# Altium PCB Cordobejro.PcbDoc
Units mm, origin at the board's own origin, x right, y up, seen from the top; angles counter-clockwise.
Board outline 36 x 35 mm, 3 copper layers (Top Layer, GroundPanel, Bottom Layer), stack 0.427 mm thick; 40 components, 31 nets, 167 pads, 52 vias.
Unrouted connection lines stored in the file: 2.
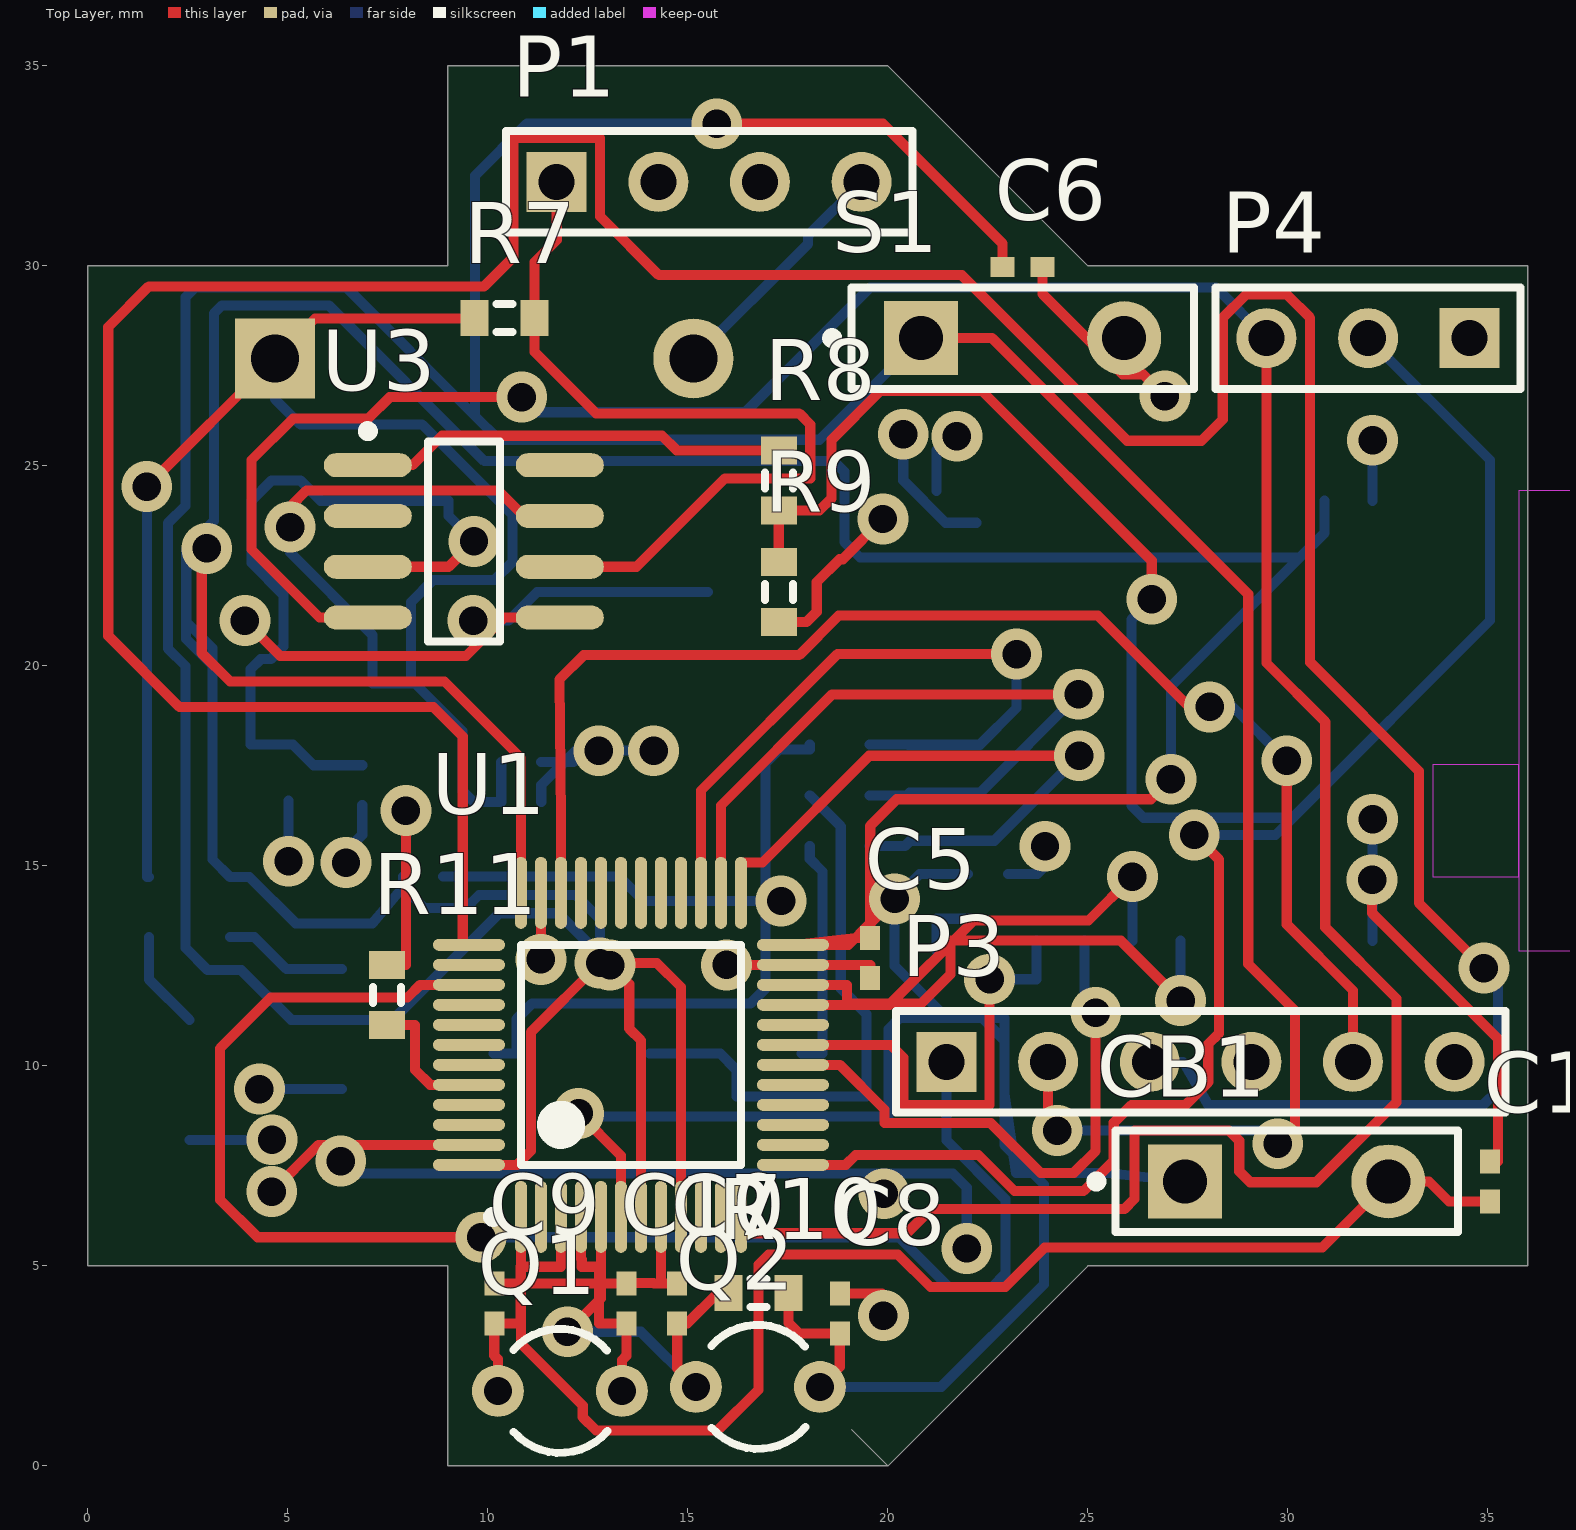
[diagram p0: Top Layer view]
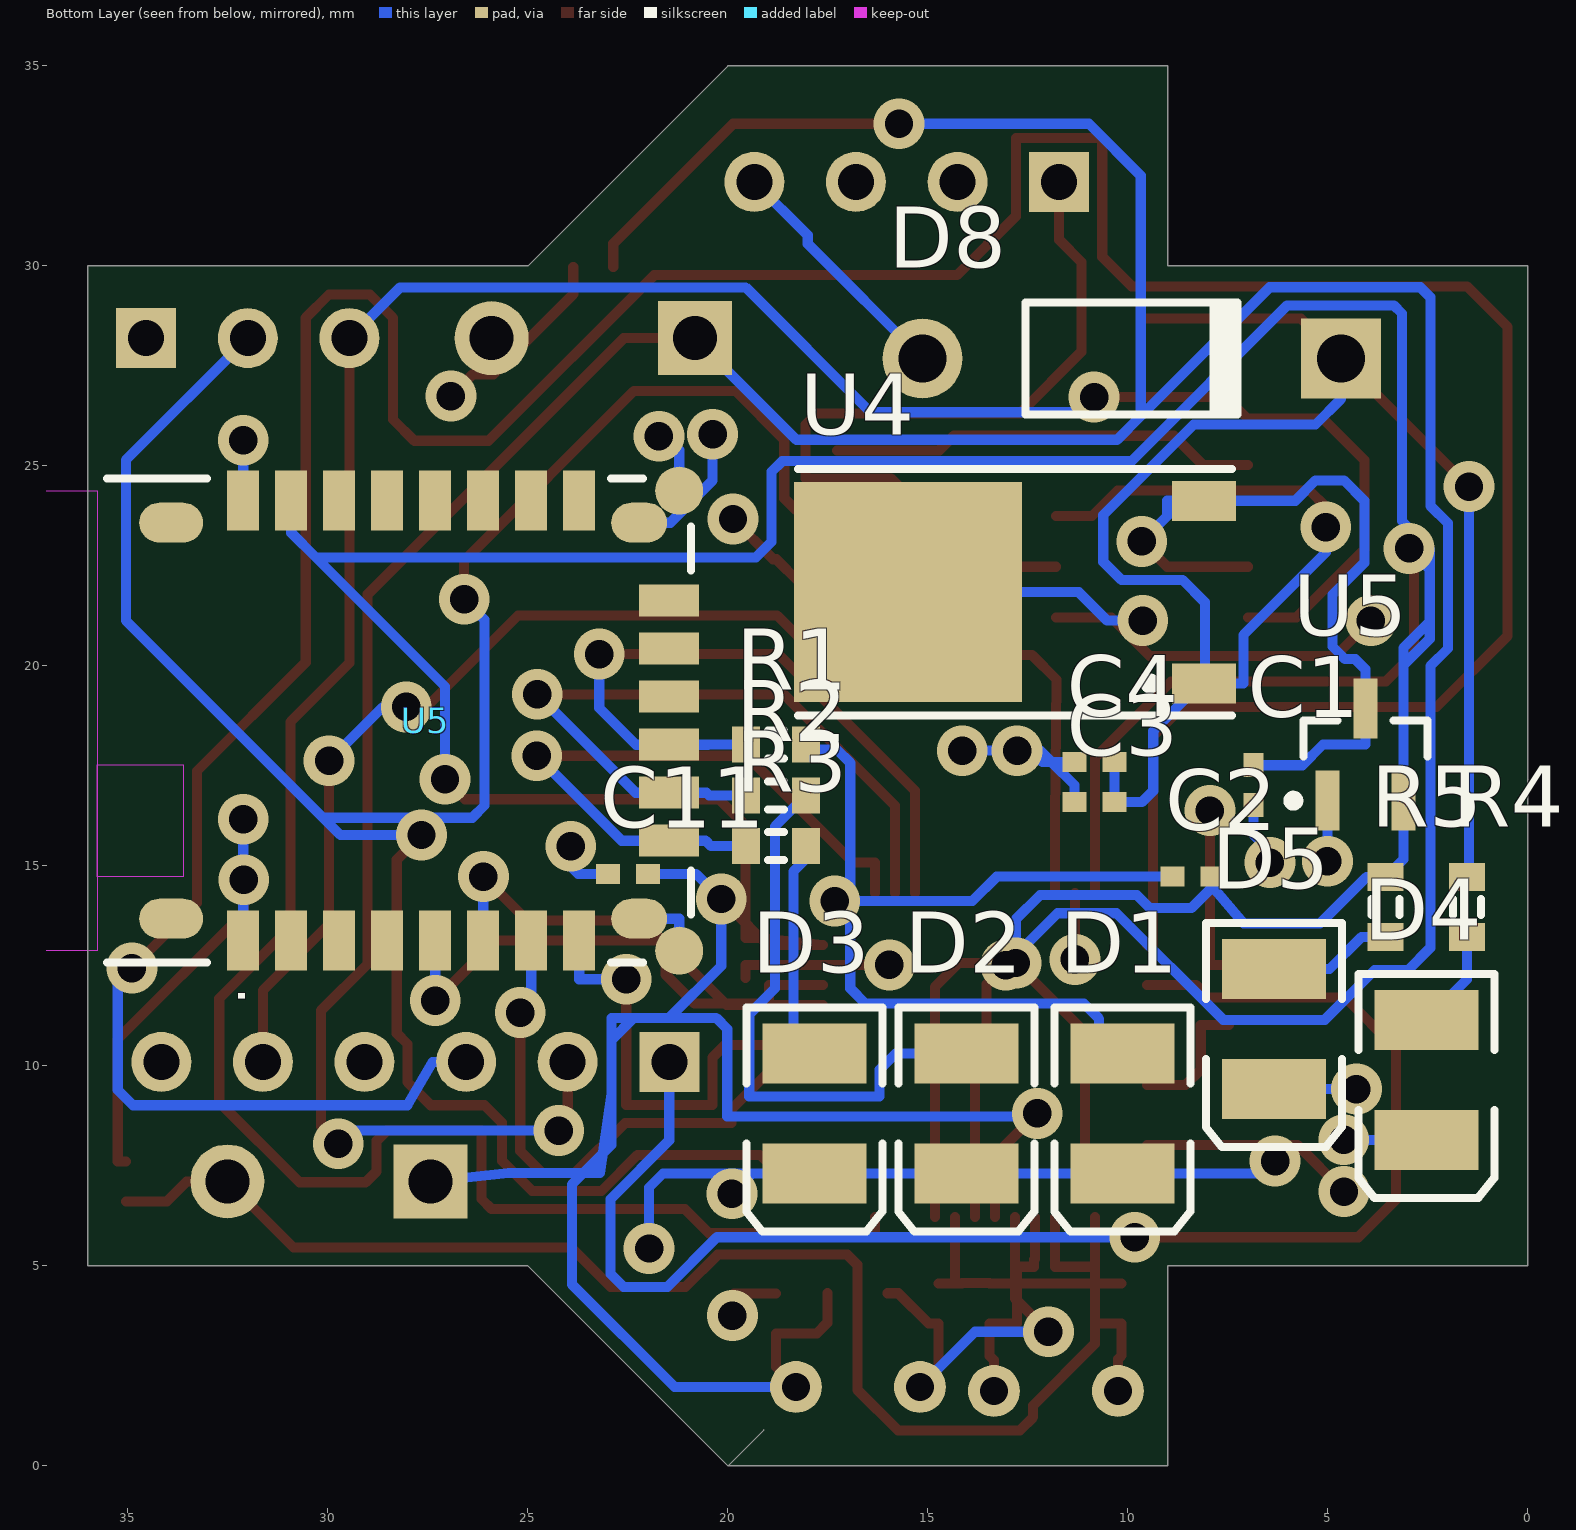
[diagram p1: Bottom Layer view, seen from below]
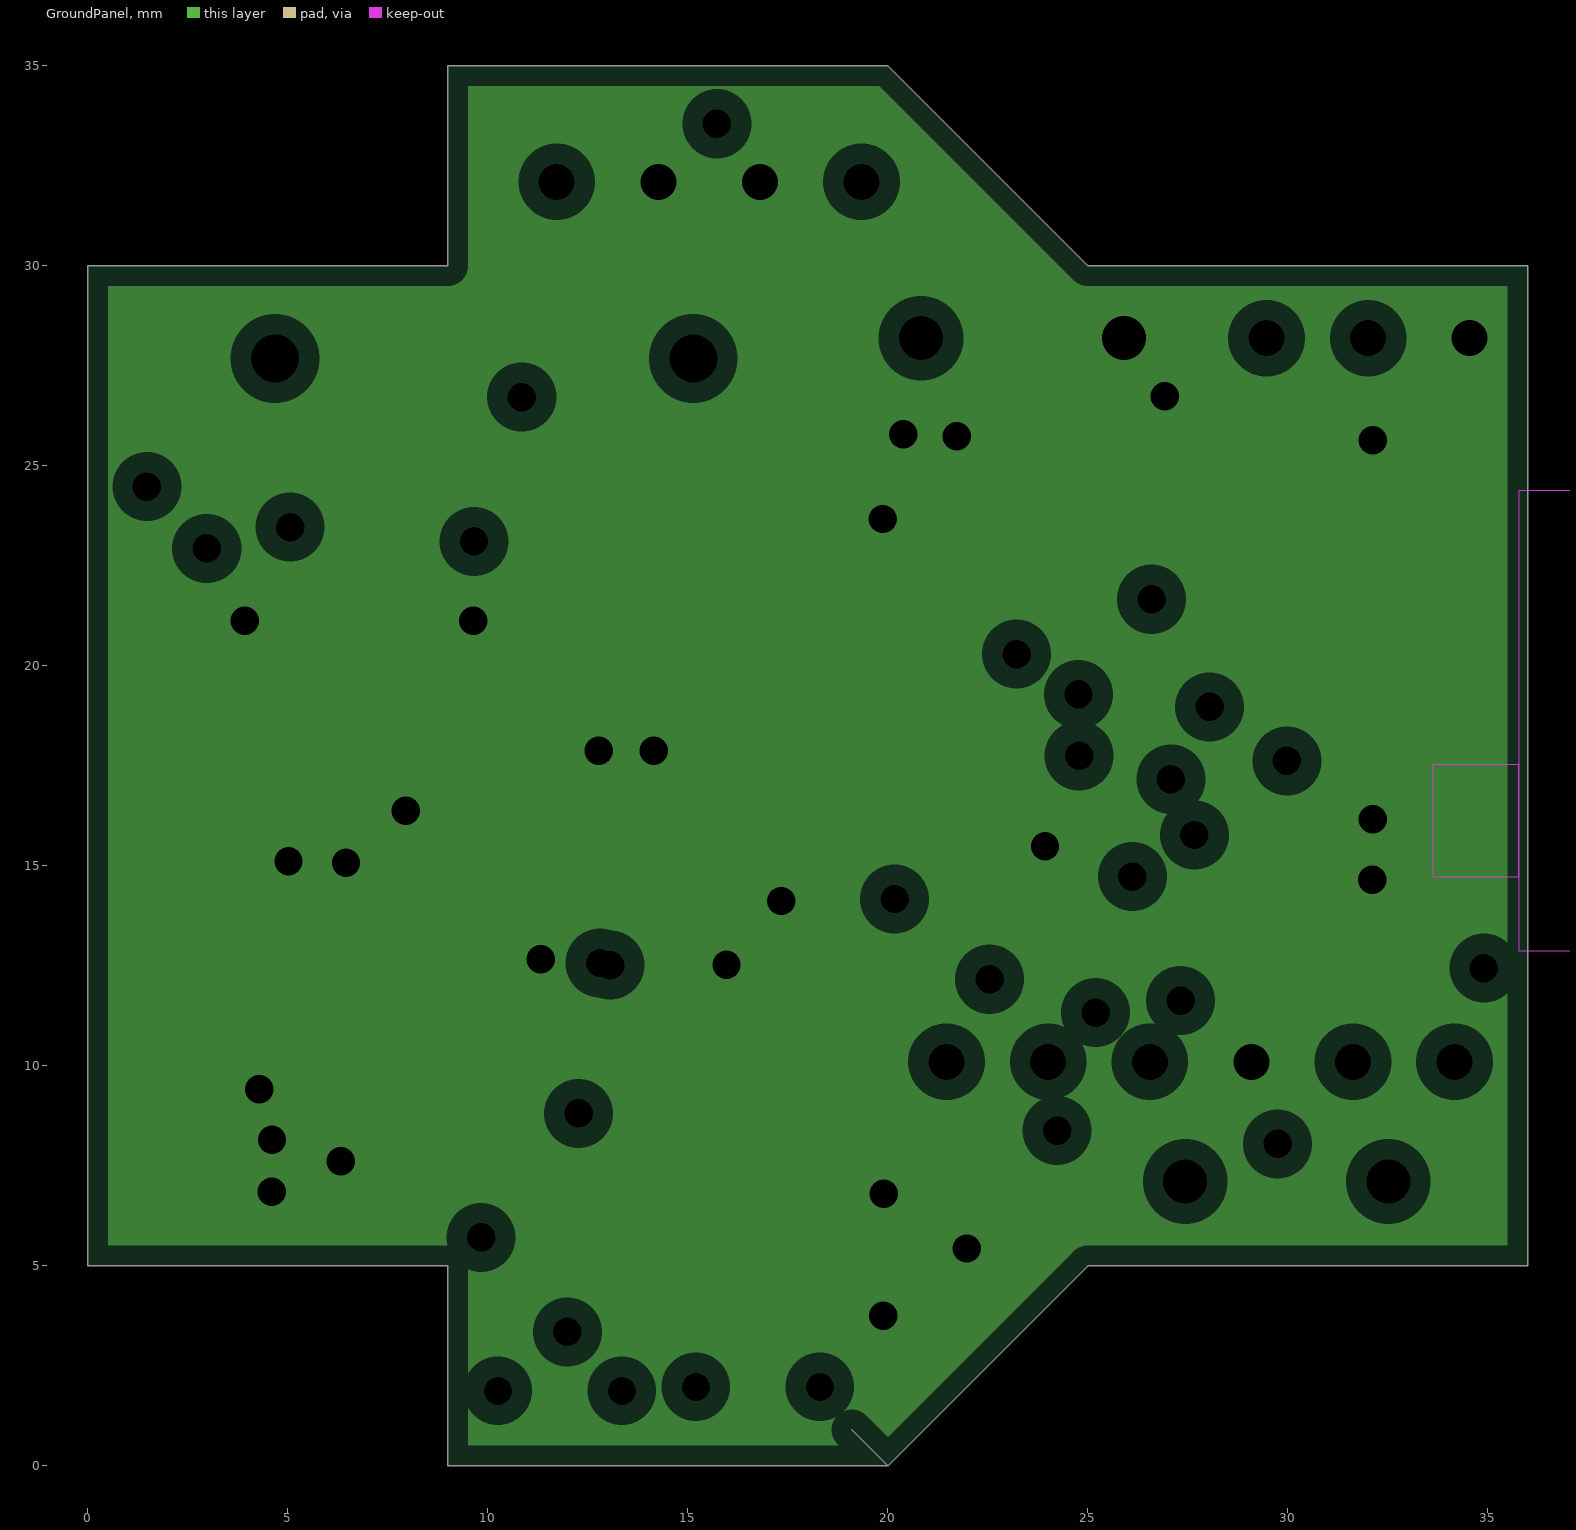
[diagram p2: GroundPanel, clearances drawn from the general rule]

## Layer stack, top to bottom
Top Solder: solder mask 0.0102, Solder Resist, Dk 3.5
Top Layer: signal copper 0.0356
GroundPanel: plane copper 0.036, net GND
Dielectric1: dielectric 0.32, FR-4, Dk 4.8
Bottom Layer: signal copper 0.0356
Bottom Solder: solder mask 0.0102, Solder Resist, Dk 3.5

## Board outline
9,0 9,5 0,5 0,30 9,30 9,35 20,35 25,30 36,30 36,5 25,5 20,0 19.1,0.9 20,0

## Design rules (kind name [scope] priority, off if disabled: settings)
Clearance [All] p1: gap=0.2 ignorepadtopadclearanceinfootprint=TRUE except(0: Arc-Hole Track-Hole SMDPad-Hole THPad-Hole Via-Hole Fill-Hole Poly-Hole Region-Hole Text-Hole)
FabricationTestPointUsage TestPointUsage [All] p1: valid=0 allowmultiple=FALSE
FabricationTestpoint Testpoint [All] p1: side=3 testpointundercomponent=TRUE minsize=1.016 maxsize=2.54 preferedsize=1.524 minholesize=0 maxholesize=1.016 preferedholesize=0.813 testpointgrid=0.025 allowsidetop=TRUE allowsidebottom=TRUE usegrid=TRUE gridtolerance=0
PlaneClearance [All] p1: clearance=0.508
PlaneConnect [All] p1: planeconnectstyle=Relief reliefexpansion=0.508 reliefentries=4 reliefconductorwidth=0.254 reliefairgap=0.254
PolygonConnect [All] p1: connectstyle=Relief reliefconductorwidth=0.254 reliefentries=4 polygonreliefangle="90 Angle" airgapwidth=0.254
RoutingVias [All] p1: holewidth=0.711 width=1.27 viastyle="Through Hole" minholewidth=0.711 minwidth=1.27 maxholewidth=0.711 maxwidth=1.27
SMDNeckDown [All] p1: percent=100.000
SilkToSolderMaskClearance SilkscreenOverComponentPads [IsPad] p1: minsilkscreentomaskgap=0.254 clearancetoexposedcopper=TRUE
SolderMaskExpansion [All] p1: expansion=0.102
Width [All] p1: maxlimit=0.254 minlimit=0.254 preferedwidth=0.254
25 further rules are at their usual default settings.

## Components (designator, comment, footprint, x,y, rotation, side; value= is the part's Value field where it differs from the comment)
C1 "1u" 0402 6.858,17.018 r90 bottom
C2 "1u" 0402 8.382,14.732 r180 bottom
C3 "47u" 0402 10.834,16.594 r180 bottom
C4 "100n" 0402 10.834,17.594 r180 bottom
C5 "100n" 0402 19.558,12.7 r90 top
C6 "100n" 0402 23.368,29.972 r180 top
C7 "22p" 0402 14.732,4.064 r90 top
C8 "22p" 0402 18.796,3.81 r90 top
C9 "10p" 0402 10.16,4.064 r270 top
C10 "10p" 0402 13.462,4.064 r270 top
C11 "4.7uF" 0402 22.5,14.8 r0 bottom
C12 "1u" 0402 35.052,7.112 r270 top
CB1 "Circuit Breaker" SPST-2 29.972,7.112 r0 top
D1 "Green" 3.5X2.8X1.9 10.138,8.81 r270 bottom
D2 "Red" 3.5X2.8X1.9 14.038,8.81 r270 bottom
D3 "Blue" 3.5X2.8X1.9 17.838,8.81 r270 bottom
D4 "Red" 3.5X2.8X1.9 2.54,9.652 r270 bottom
D5 "Blue" 3.5X2.8X1.9 6.35,10.922 r270 bottom
D8 "Diode 1N4007" DO-41 9.906,27.686 r180 bottom
P1 "Header 4" HDR1X4 11.72,32.1 r0 top
P3 "Header 6" HDR1X6 21.466,10.1 r0 top
P4 "Header 3" HDR1X3 34.544,28.194 r180 top
Q1 "32.768kHz" R38 11.8,1.876 r90 top
Q2 "8MHz" R38 16.75,1.976 r90 top
R1 "330" J1-0603 18.796,18.034 r0 bottom
R2 "330" J1-0603 18.796,16.764 r0 bottom
R3 "330" J1-0603 18.796,15.494 r0 bottom
R4 "330" J1-0603 1.524,13.97 r90 bottom
R5 "330" J1-0603 3.556,13.97 r90 bottom
R7 "510" J1-0603 10.414,28.702 r0 top
R8 "12k" J1-0603 17.272,24.638 r90 top
R9 "22k" J1-0603 17.272,21.844 r90 top
R10 "1M" J1-0603 16.764,4.318 r180 top
R11 "10k" J1-0603 7.476,11.776 r90 top
S1 "SW-PB" SPST-2 23.368,28.194 r0 top
U1 "STM32F103CBT6" LQFP48_N 13.576,10.276 r90 top
U3 "L9637D" SO8_N 9.398,23.114 r0 top
U4 "MC78M05BDTRK" 369A-13 11.794,21.844 r90 bottom
U5 "RN2020-V/RM" RN4020_ALT 32.118,13.13 r90 bottom
U5 "MCP1703T-3302E/CB" SOT-23A-CB3_N 4.064,17.78 r90 bottom

## Footprints (in the part's own frame and the unit in brackets; to place one, negate y for a bottom-side part, rotate by r counter-clockwise, add the part's x,y. Pads: shape width x height; smd on the part's side, far side on the other; paste and mask are expansions set on the pad)
3.5X2.8X1.9 [mm] "SM LED; 2 C-Bend Leads; Body 3.5 x 2.8 x 1.9 mm, inc leads (LxWxH typ)"
  rect 1.5x2.6 smd: 1(-1.5,0) 2(1.5,0)
  silkscreen extent -2.65,-1.7 2.95,1.7
369A-13 [mm] "D-PAK/TO-252-AA; 3 Leads (1 Cropped); Body 10.3 (inc. leads) x 6.7 mm (LxW max)"
  rect 1x1.6 smd: 1(-2.285,-3.7) 3(2.285,-3.7)
  rect 5.5x5.7 smd: 4(0,3.7)
  silkscreen extent -3.08,-4.4 3.08,6.45
0402 [mm] "Chip Capacitor, Body 1.0x0.5mm, IPC High Density"
  rect 0.6x0.5 smd: 1(-0.5,0) 2(0.5,0)
  body extent -0.55,-0.3 0.55,0.3, height 1.3
DO-41 [mm] "Diode, Axial; Body 5.2 x 2.7 mm (LxDia. max), Lead Dia. 0.86 mm (max)"
  round 2 hole 1.2: 1(-5.23,0)
  rect 2x2 hole 1.2: 2(5.23,0)
  silkscreen extent -2.65,-1.4 2.75,1.4
HDR1X3 [mm] "Connector; Header; 3 Position"
  rect 1.5x1.5 hole 0.9: 1(0,0)
  round 1.5 hole 0.9: 2(2.54,0) 3(5.08,0)
  silkscreen extent -1.27,-1.27 6.35,1.27
HDR1X4 [mm] "Connector; Header; 4 Position"
  rect 1.5x1.5 hole 0.9: 1(0,0)
  round 1.5 hole 0.9: 2(2.54,0) 3(5.08,0) 4(7.62,0)
  silkscreen extent -1.27,-1.27 8.89,1.27
HDR1X6 [mm] "Connector; Header; 6 Position"
  rect 1.5x1.5 hole 0.9: 1(0,0)
  round 1.5 hole 0.9: 2(2.54,0) 3(5.08,0) 4(7.62,0) 5(10.16,0) 6(12.7,0)
  silkscreen extent -1.27,-1.27 13.97,1.27
J1-0603 [mm] "Chip Resistor, Body 1.6x0.8mm, IPC High Density"
  rect 0.7x0.9 smd: 1(-0.75,0) 2(0.75,0)
  silkscreen extent -0.2,-0.35 0.2,0.35, body extent -0.85,-0.48 0.85,0.48, height 0.9
LQFP48_N [mm] "Thin QFP, 48-Leads, Body 7x7mm, Pitch 0.5mm, IPC Medium Density"
  oval 1.8x0.3 smd: 1(-4.05,2.75) 2(-4.05,2.25) 3(-4.05,1.75) 4(-4.05,1.25) 5(-4.05,0.75) 6(-4.05,0.25) 7(-4.05,-0.25) 8(-4.05,-0.75) 9(-4.05,-1.25) 10(-4.05,-1.75) 11(-4.05,-2.25) 12(-4.05,-2.75) 25(4.05,-2.75) 26(4.05,-2.25) 27(4.05,-1.75) 28(4.05,-1.25) 29(4.05,-0.75) 30(4.05,-0.25) 31(4.05,0.25) 32(4.05,0.75) 33(4.05,1.25) 34(4.05,1.75) 35(4.05,2.25) 36(4.05,2.75)
  oval 0.3x1.8 smd: 13(-2.75,-4.05) 14(-2.25,-4.05) 15(-1.75,-4.05) 16(-1.25,-4.05) 17(-0.75,-4.05) 18(-0.25,-4.05) 19(0.25,-4.05) 20(0.75,-4.05) 21(1.25,-4.05) 22(1.75,-4.05) 23(2.25,-4.05) 24(2.75,-4.05) 37(2.75,4.05) 38(2.25,4.05) 39(1.75,4.05) 40(1.25,4.05) 41(0.75,4.05) 42(0.25,4.05) 43(-0.25,4.05) 44(-0.75,4.05) 45(-1.25,4.05) 46(-1.75,4.05) 47(-2.25,4.05) 48(-2.75,4.05)
  silkscreen extent -4.17,-2.75 2.75,3.57, body extent -3.5,-3.5 3.5,3.5, height 1.6
R38 [mm] "Crystal, Thru-Hole; 2 Leads; Body 3.1 x 8.2 mm (Dia.xH)"
  round 1.3 hole 0.7: 1(0,1.55) 2(0,-1.55)
  silkscreen extent -1.55,-1.19 1.55,1.17
RN4020_ALT [mm] "Bluetooth BLE Module - Microchip"
  rect 1.5x0.8 smd: 1(0,0) 2(0,-1.2) 3(0,-2.4) 4(0,-3.6) 5(0,-4.8) 6(0,-6) 7(0,-7.2) 8(0,-8.4) 17(11,-8.4) 18(11,-7.2) 19(11,-6) 20(11,-4.8) 21(11,-3.6) 22(11,-2.4) 23(11,-1.2) 24(11,0)
  oval 1x1.6 smd: 1A(0.55,1.8) 24A(10.45,1.8)
  round 1.2 smd: 9(-0.25,-10.9) 16(11.25,-10.9)
  oval 1x1.4 smd: 9(0.55,-9.9) 16(10.45,-9.9)
  rect 0.8x1.5 smd: 10(2.5,-10.65) 11(3.7,-10.65) 12(4.9,-10.65) 13(6.1,-10.65) 14(7.3,-10.65) 15(8.5,-10.65)
  Keep-Out Layer region: -0.25,8.601 11.25,8.601 11.25,3.651 -0.25,3.651
  Keep-Out Layer region: 1.6,3.651 4.4,3.651 4.4,1.501 1.6,1.501
  silkscreen extent -0.55,-11.2 11.55,3.4, body extent -0.25,-10.9 11.25,8.6, height 2.3
SO8_N [mm] "SOIC, 8-Leads, Body 4.9x3.9mm, Pitch 1.27mm, IPC Medium Density"
  oval 2.2x0.6 smd: 1(-2.4,1.905) 2(-2.4,0.635) 3(-2.4,-0.635) 4(-2.4,-1.905) 5(2.4,-1.905) 6(2.4,-0.635) 7(2.4,0.635) 8(2.4,1.905)
  silkscreen extent -2.52,-2.5 0.9,2.88, body extent -1.95,-2.45 1.95,2.45, height 1.75
SOT-23A-CB3_N [mm] "SOT346, 3-Leads, Body 2.9x1.5mm, Pitch 0.95mm, Lead Span 2.6mm, IPC Medium Density"
  rect 1.5x0.6 smd: 1(-1.15,0.95) 2(-1.15,-0.95) 3(1.15,0)
  silkscreen extent -1.27,-1.55 0.85,1.93, body extent -0.85,-1.55 0.85,1.55, height 1.45
SPST-2 [mm] "Switch; 2 Leads"
  rect 1.85x1.85 hole 1.1: 1(-2.54,0)
  round 1.85 hole 1.1: 2(2.54,0)
  silkscreen extent -4.89,-1.27 4.28,1.27

## Part data
C1 C2 C3 C4 C5 C6 C7 C8 C9 C10 C11 C12: library part Cap, "Capacitor", LatestRevisionDate=17-Jul-2002, LatestRevisionNote="Re-released for DXP Platform.", PackageDescription="Radial Cap, Thru-Hole; 2 Leads; 0.3 in Pin Spacing", PackageReference=RAD-0.3, Published=8-Jun-2000, Publisher="Altium Limited"
D1 D2 D3 D4 D5: library part LED3, "Typical BLUE SiC LED", DatasheetVersion=16-Apr-2002, LatestRevisionDate=17-Dec-2003, LatestRevisionNote="PCB Footprint replaced.", PackageDescription="SM LED; 2 C-Bend Leads; Body 3.5 x 2.8 x 1.9 mm, inc leads (LxWxH typ)", PackageReference=3.5X2.8X1.9, PackageVersion=16-Apr-2002, Published=8-Jun-2000, Publisher="Altium Limited"
D8: "1 Amp General Purpose Rectifier", Code_JEDEC=DO-204-AL, ComponentLink1Description="Manufacturer Link", ComponentLink1URL=http://www.fairchildsemi.com/, ComponentLink2Description=Datasheet, ComponentLink2URL=http://www.fairchildsemi.com/ds/1N%2F1N4001.pdf, DatasheetVersion=1998, LatestRevisionDate=17-Jul-2002, LatestRevisionNote="Re-released for DXP Platform.", PackageDescription="Diode, Axial; Body 5.2 x 2.7 mm (LxDia. max), Lead Dia. 0.86 mm (max)", PackageReference=DO-41, PackageVersion=Aug-1999, Published=8-Jun-2000, Publisher="Altium Limited"
P1: "Header, 4-Pin", LatestRevisionDate=17-Jul-2002, LatestRevisionNote="Re-released for DXP Platform.", Publisher="Altium Limited"
P3: "Header, 6-Pin", LatestRevisionDate=17-Jul-2002, LatestRevisionNote="Re-released for DXP Platform.", Publisher="Altium Limited"
P4: "Header, 3-Pin", LatestRevisionDate=17-Jul-2002, LatestRevisionNote="Re-released for DXP Platform.", Publisher="Altium Limited"
Q1 Q2: library part XTAL, "Crystal Oscillator", LatestRevisionDate=17-Jul-2002, LatestRevisionNote="Re-released for DXP Platform.", PackageDescription="Crystal, Thru-Hole; 2 Leads; Body 3.1 x 8.2 mm (Dia.xH)", PackageReference=R38, Published=8-Jun-2000, Publisher="Altium Limited"
R1 R2 R3 R4 R5 R7 R8 R9 R10 R11: library part Res2, "Resistor", LatestRevisionDate=17-Jul-2002, LatestRevisionNote="Re-released for DXP Platform.", PackageDescription="Axial Device, Thru-Hole; 2 Leads; 0.4 in Pin Spacing", PackageReference=AXIAL-0.4, Published=8-Jun-2000, Publisher="Altium Limited"
S1: "Switch", LatestRevisionDate=17-Jul-2002, LatestRevisionNote="Re-released for DXP Platform.", PackageDescription="Switch; 2 Leads", PackageReference=SPST-2, Published=24-Mar-1999, Publisher="Altium Limited"
U1: "STM32 ARM-based 32-bit MCU with 128 Kbytes Flash, 48-pin LQFP, Industrial Temperature", ComponentLink1Description="Manufacturer Link", ComponentLink1URL=www.st.com/stm32, ComponentLink2Description=Datasheet, ComponentLink2URL=http://www.st.com/stonline/products/literature/ds/13587.pdf, DatasheetVersion="rev6, Mar-2008", PackageDescription="48-Pin Low-Profile Quad Flat Pack, 7 x 7 mm Body, 0.5 mm Pitch (LQFP48)", PackageReference=LQFP48, PackageVersion=Mar-2008, Published=30-May-2008, Publisher="Altium Limited"
U3: "ISO 9141 Interface", Code_IPC=SOIC127P600-8, Code_JEDEC=MS-012-AA, ComponentLink1Description="Manufacturer Link", ComponentLink1URL=http://www.st.com/, ComponentLink2Description=Datasheet, ComponentLink2URL=http://www.st.com/stonline/products/literature/ds/1765/l9637.pdf, DatasheetVersion=Dec-1998, LatestRevisionDate=13-Apr-2006, LatestRevisionNote="IPC-7351 Footprint Added.", PackageDescription="8-Pin Small Outline Integrated Circuit 1.27 mm Pitch", PackageReference=SO8, PackageVersion=Dec-2002, Published=24-Aug-2001, Publisher="Altium Limited"
U4: "Three-Terminal Medium Current Positive Voltage Regulator", ComponentLink1Description="Manufacturer Link", ComponentLink1URL=http://www.onsemi.com/site/products/taxonomy/0,4438,503,00.html, ComponentLink2Description=Datasheet, ComponentLink2URL=http://www.onsemi.com/pub/Collateral/MC78M00-D.PDF, DatasheetVersion=Apr-2000, Note="Pin 2 is electrically connected to Pin 4; Pin 2 is trimmed and not drawn;", PackageDescription="D-PAK/TO-252-AA; 3 Leads (1 Cropped); Body 10.3 (inc. leads) x 6.7 mm (LxW max)", PackageReference=369A-13, PackageVersion=1997, Published=15-Apr-2002, Publisher="Altium Limited"
U5: library part RN2020-V/RM123, "Microchip RN4020 Bluetooth"
U5: "250 mA, 16V, Low Quiescent Current LDO Regulator, 3-Pin SOT-23A, Extended Temperature, Tape and Reel", Supplier Part Number 1=MCP1703T-3302E/CBTR-ND, ComponentLink1Description=Datasheet, ComponentLink1URL=http://ww1.microchip.com/downloads/en/DeviceDoc/22049d.pdf, ComponentLink2Description="Packaging Specification", ComponentLink2URL=http://www.microchip.com/stellent/groups/techpub_sg/documents/packagingspec/en012702.pdf, ComponentLink3Description="Microchip.com Home", ComponentLink3URL=http://www.microchip.com/, DatasheetVersion="revD, Sep-2009", PackageDescription="3-Lead Plastic Small Outline Transistor (CB) [SOT-23A]", PackageReference=SOT-23A-CB3, PackageVersion="revBB, Aug-2009", Published=29-Jan-2009, Publisher="Altium Limited", Supplier 1=Digi-Key, Supplier 2=Digi-Key, Supplier 3=Digi-Key, Supplier 4=Farnell, Supplier Part Number 2=MCP1703T-3302E/CBCT-ND, Supplier Part Number 3=MCP1703T-3302E/CBDKR-ND, Supplier Part Number 4=1439518
CB1: LatestRevisionDate=17-Jul-2002, LatestRevisionNote="Re-released for DXP Platform.", PackageDescription="Switch; 2 Leads", PackageReference=SPST-2, Published=24-Mar-1999, Publisher="Altium Limited"

## Via types
v1: diameter 1.27, hole 0.711, Top Layer to Bottom Layer, 52 vias

## Nets (pads, with @x,y where several pads share a name; then routed paths per layer and width w, separated by ;. In a path a pad name is that pad's centre, name@x,y a point inside that pad or via, vN(x,y) a via of type N, cw(c..) or ccw(c..) an arc to the next point about the centre after c; other vN are vias at no path point)
3.3V: C2.2 C5.2 C11.1 CB1.1 R5.2 U1.9 U1.24 U1.36 U1.48 U5.2@3.114,16.63 U5.23 | length 131.8
  Top Layer w0.254: v1(2.972,22.936) 2.845,22.809 2.845,20.32 3.556,19.609 8.915,19.609 10.826,17.698 U1.36 ; U1.48 10.726,7.526 11.074,7.874 11.074,10.846 v1(12.802,12.573) 14.224,12.573 14.826,11.971 U1.9 ; v1(27.073,17.167) 26.572,16.666 20.222,16.666 19.558,16.002 19.558,13.567 ; 19.188,13.199 19.374,13.385 19.558,13.567 ; 19.188,13.199 19.013,13.026 U1.24 19.188,13.199 ; 19.188,13.199 19.194,13.2 C5.2 19.558,13.564 ; 19.558,13.564 19.558,13.567 ; 19.558,13.564 v1(20.168,14.173) 19.558,13.567
  Bottom Layer w0.254: v1(2.972,22.936) 2.464,22.428 2.464,21.097 3.114,20.447 3.114,20.019 ; C2.2 7.882,14.478 ; v1(12.802,12.573) 12.802,13.665 12.192,14.275 9.779,14.275 9.449,13.945 8.415,13.945 7.882,14.478 ; C11.1 20.794,14.8 v1(20.168,14.173) 20.168,12.497 21.463,11.201 22.911,11.201 22.911,9.296 23.203,7.327 25.49,7.327 CB1.1 ; v1(27.073,17.167) 27.073,19.485 30.299,22.711 ; U5.23 30.918,23.33 30.299,22.711 ; 3.114,20.019 3.114,16.63 3.114,15.162 R5.2 4.039,14.72 5.195,13.564 7.112,13.564 7.882,14.478 ; 3.114,20.019 2.454,20.679 2.454,22.926 3.15,23.622 3.15,28.81 3.353,29.013 6.02,29.013 9.912,25.121 18.644,25.121 18.911,24.853 18.911,23.103 19.304,22.711 30.299,22.711
12V: D8.1 P1.4 | length 6.2
  Bottom Layer w0.254: D8.1 18.006,30.556 18.006,30.766 P1.4
GND: C1.1 C2.1 C3.1 C4.1 C5.1 C6.1 C7.2 C8.2 C9.1 C10.1 C11.2 C12.1 D1.2 D2.2 D3.2 D4.2 D5.2 P1.2 P1.3 P3.4 P4.1 R9.1 R11.2 S1.2 U1.8 U1.23 U1.35 U1.47 U3.5 U4.4 U5.1 U5.9 U5.16 U5.24 | length 107.4
  Top Layer w0.254: v1(3.924,21.133) 4.81,20.247 9.453,20.247 10.415,21.209 U3.5 ; v1(4.597,6.858) 5.765,8.026 U1.47 ; R11.2 7.95,12.526 v1(7.95,16.383) ; C9.1 12.167,4.564 C10.1 13.462,4.572 14.14,4.572 14.148,4.564 14.326,4.564 ; v1(11.326,12.664) U1.35 ; U1.8 14.326,4.564 ; C7.2 14.326,4.564 ; v1(15.964,12.526) U1.23 19.552,12.526 19.558,12.52 C5.1 ; R9.1 17.961,21.094 18.222,21.355 18.222,22.098 18.792,22.669 18.869,22.669 v1(19.873,23.673) ; C8.2 19.845,4.31 19.888,4.267 v1(19.888,3.759) ; C6.1 23.868,29.294 25.869,27.293 26.377,27.293 v1(26.924,26.746) ; v1(32.106,14.656) 32.106,13.821 35.255,10.671 35.255,7.612 C12.1
  Bottom Layer w0.254: D4.2 v1(4.602,8.152) ; v1(4.288,9.422) D5.2 ; v1(5.014,15.118) U5.1@5.014,16.63 ; v1(6.319,7.62) 6.319,7.515 6.524,7.31 D1.2 D2.2 D3.2 19.392,7.31 ; v1(6.452,15.083) 6.452,15.369 6.858,15.776 C1.1 ; C2.1 13.282,14.732 13.892,14.122 v1(17.328,14.122) ; v1(9.629,21.133) 10.516,21.133 11.227,21.844 U4.4 ; C3.1 11.334,17.024 11.904,17.594 ; C4.1 11.904,17.594 ; v1(14.141,17.882) v1(12.769,17.882) v1@12.423,17.882 ; v1(19.9,6.802) 19.392,7.31 ; v1(20.383,25.793) 20.383,24.638 21.441,23.58 U5.16@22.218,23.58 ; U5.9@21.218,12.88 21.218,13.68 U5.9@22.218,13.68 ; U5.16@21.218,24.38 21.218,25.4 21.56,25.742 v1(21.726,25.742) ; v1(21.971,5.436) 21.971,6.96 21.621,7.31 19.392,7.31 ; C11.2 23.741,14.8 23.927,14.986 v1(23.927,15.494) ; U5.1@32.118,13.13 v1(32.118,16.166) ; U5.24 v1(32.118,25.642) ; 11.904,17.594 12.192,17.882 v1@12.423,17.882 ; 11.904,17.594 12.136,17.594 v1@12.423,17.882
"ISO9141-2 K": P1.1 R7.2 U3.6 | length 20.7
  Top Layer w0.254: P1.1 11.72,30.655 11.164,30.099 R7.2 11.164,27.85 12.7,26.314 17.78,26.314 18.059,26.035 18.059,24.689 15.926,24.689 13.716,22.479 U3.6
NetC1_2: C1.2 U3.3 U4.3 U5.3@4.064,18.93 | length 19.5
  Top Layer w0.254: U3.3 9.017,22.479 v1(9.652,23.114)
  Bottom Layer w0.254: C1.2 5.639,17.518 5.123,18.034 4.064,18.034 4.064,18.93 4.064,19.917 4.318,20.171 4.572,20.171 4.886,20.485 4.886,21.781 4.089,22.577 4.089,24.13 4.597,24.638 5.309,24.638 5.818,24.129 U4.3 9.017,24.129 9.017,23.749 v1(9.652,23.114)
NetC3_2: C3.2 C4.2 D8.2 R4.2 R7.1 U3.7 U4.1 | length 52.8
  Top Layer w0.254: v1(1.473,24.483) D8.2 5.676,28.686 9.664,28.686 R7.1 ; v1(5.055,23.47) 5.055,23.978 5.461,24.384 10.262,24.384 10.897,23.749 U3.7
  Bottom Layer w0.254: v1(1.473,24.483) 1.473,14.72 R4.2 ; D8.2 4.676,26.67 5.311,26.035 8.356,26.035 10.617,23.774 10.617,22.606 10.163,22.152 8.636,22.152 8.077,21.593 U4.1@8.077,19.559 ; v1(5.055,23.47) 5.055,22.834 7.112,20.777 7.112,19.559 U4.1@8.077,19.559 ; C4.2 C3.2 9.652,16.594 9.366,16.88 9.366,18.372 8.179,19.559 U4.1 U4.1@8.077,19.559
NetC7_1: C7.1 Q2.1 R10.2 U1.5 | length 10.4
  Top Layer w0.254: v1(11.989,3.353) 12.826,4.19 U1.5 ; Q2.1 14.732,2.444 C7.1 14.986,3.564 15.74,4.318 R10.2
  Bottom Layer w0.254: v1(11.989,3.353) 13.823,3.353 Q2.1
NetC8_1: C8.1 Q2.2 R10.1 U1.6 | length 33.1
  Top Layer w0.254: v1(12.268,8.814) 13.326,7.756 U1.6 ; R10.1 17.514,3.576 17.78,3.31 C8.1 18.796,2.472 Q2.2
  Bottom Layer w0.254: v1(12.268,8.814) 12.344,8.738 20.015,8.738 20.015,10.922 20.295,11.201 22.352,11.201 22.911,10.643 22.911,8.026 23.901,7.036 23.901,4.544 21.334,1.976 Q2.2
NetC9_2: C9.2 Q1.1 U1.3 | length 6.1
  Top Layer w0.254: Q1.1 10.25,2.667 10.16,2.757 C9.2 10.82,3.564 10.82,4.978 11.826,4.978 U1.3
NetC10_2: C10.2 Q1.2 U1.4 | length 5.5
  Top Layer w0.254: U1.4 12.326,5.175 12.344,5.156 12.344,4.978 12.776,4.978 12.776,3.564 C10.2 13.462,2.754 13.35,2.642 Q1.2
NetC12_2: C12.2 CB1.2 U1.1 | length 33.8
  Top Layer w0.254: U1.1 10.826,3.054 12.37,1.511 12.37,1.219 12.7,0.889 15.748,0.889 16.764,1.905 16.764,5.029 17.018,5.283 20.254,5.283 21.063,4.474 22.933,4.474 23.921,5.461 30.861,5.461 CB1.2 33.528,7.112 34.028,6.612 C12.2
NetD1_1: D1.1 R1.1 | length 15
  Bottom Layer w0.254: D1.1 10.719,10.31 10.719,11.176 11.1,11.557 16.561,11.557 16.942,11.938 16.942,17.577 17.272,17.907 18.046,17.907 R1.1
NetD2_1: D2.1 R2.1 | length 14.4
  Bottom Layer w0.254: D2.1 15.807,10.31 16.211,9.906 16.211,9.233 19.465,9.233 19.465,11.294 18.821,11.938 18.821,15.989 R2.1
NetD3_1: D3.1 R3.1 | length 5.8
  Bottom Layer w0.254: D3.1 18.364,10.31 18.364,14.859 18.046,15.177 R3.1
NetD4_1: D4.1 R4.1 | length 2.5
  Bottom Layer w0.254: R4.1 1.524,12.168 D4.1
NetD5_1: D5.1 R5.1 | length 3.1
  Bottom Layer w0.254: R5.1 4.163,13.22 4.961,12.422 D5.1
NetP3_1: P3.1 U1.39 | length 37.2
  Top Layer w0.254: U1.39 8.306,12.026 7.989,11.709 4.572,11.709 3.302,10.439 3.302,6.655 4.242,5.715 v1(9.83,5.715)
  Bottom Layer w0.254: v1(9.83,5.715) 20.276,5.715 21.517,4.474 22.606,4.474 22.936,4.804 22.936,6.668 21.466,8.138 P3.1
NetP4_2: P4.2 R8.1 R9.2 U1.13 | length 62
  Top Layer w0.254: R9.2 R8.1 18.288,23.888 18.593,24.193 18.593,25.654 19.812,26.873 22.352,26.873 26.594,22.631 v1(26.594,21.666) ; U1.13 18.948,7.526 19.195,7.772 22.263,7.772 23.163,6.873 24.892,6.873 25.648,7.629 25.648,8.579 26.086,9.017 27.432,9.017 28.009,9.594 28.009,10.546 28.28,10.817 28.28,15.154 v1(27.661,15.773)
  Bottom Layer w0.254: v1(26.594,21.666) 26.086,21.158 26.086,16.51 26.391,16.205 30.121,16.205 ; v1(27.661,15.773) 29.689,15.773 30.121,16.205 ; P4.2 35.052,25.146 35.052,21.136 30.121,16.205
NetP4_3: P4.3 U1.12 U3.4 | length 75
  Top Layer w0.254: U3.4 5.791,21.209 4.089,22.911 4.089,25.146 5.131,26.187 7.01,26.187 7.544,26.721 v1(10.846,26.721) ; U1.12 16.326,5.817 20.472,5.817 21.075,6.419 25.908,6.419 26.162,6.673 26.162,8.382 28.527,8.382 28.781,8.128 28.781,7.366 29.058,7.09 30.712,7.09 32.715,9.093 32.715,11.684 30.934,13.465 30.934,18.601 29.464,20.071 P4.3
  Bottom Layer w0.254: v1(10.846,26.721) 11.227,26.34 16.434,26.34 19.558,29.464 28.194,29.464 P4.3
NetR8_2: R8.2 U3.1 | length 10.7
  Top Layer w0.254: U3.1 8.114,25.019 8.851,25.756 14.351,25.756 14.719,25.388 R8.2
NetR11_1: R11.1 U1.44 | length 3.3
  Top Layer w0.254: R11.1 8.179,11.026 8.179,9.906 8.559,9.526 U1.44
NetU1_18: U1.18 U5.7 | length 14.5
  Top Layer w0.254: U1.18 18.796,10.026 19.914,8.908 19.914,8.569 22.575,8.569 23.817,7.327 24.647,7.327 25.194,7.874 v1(25.194,11.332)
  Bottom Layer w0.254: U5.7 24.918,11.608 v1(25.194,11.332)
NetU1_19: U1.19 U5.8 | length 11.5
  Top Layer w0.254: U1.19 20.066,10.526 20.389,10.203 20.389,9.023 22.543,9.023 v1(22.543,12.167)
  Bottom Layer w0.254: v1(22.543,12.167) 23.718,12.167 U5.8
NRST: C6.2 P3.2 S1.1 U1.7 | length 111.6
  Top Layer w0.254: v1(13.056,12.522) 13.532,12.046 13.532,10.933 13.826,10.639 U1.7 ; v1(15.723,33.553) 19.871,33.553 22.868,30.556 C6.2 ; S1.1 22.606,28.194 29.007,21.793 29.007,12.548 30.175,11.379 30.175,8.484 v1(29.743,8.052) ; P3.2 24.006,8.608 v1(24.232,8.382)
  Bottom Layer w0.254: v1(13.056,12.522) 11.76,13.818 10.287,13.818 7.62,11.151 5.08,11.151 3.835,12.395 2.997,12.395 2.438,12.954 2.438,19.996 2,20.435 2,23.565 2.438,24.003 2.438,29.216 2.689,29.467 6.457,29.467 9.677,26.247 ; v1(15.723,33.553) 10.973,33.553 9.677,32.258 9.677,26.247 ; S1.1 18.288,25.654 10.27,25.654 9.677,26.247 ; v1(24.232,8.382) 29.413,8.382 v1(29.743,8.052)
PIO1: R3.2 U1.25 U5.10 | length 16.5
  Top Layer w0.254: U1.25 16.326,15.088 16.866,15.088 19.533,17.755 v1(24.781,17.755)
  Bottom Layer w0.254: R3.2 20.422,15.494 20.558,15.63 U5.10 22.657,15.63 v1(24.781,17.755)
PIO2: R2.2 U1.26 U5.11 | length 18.5
  Top Layer w0.254: U1.26 15.826,16.51 18.606,19.29 v1(24.765,19.29)
  Bottom Layer w0.254: R2.2 20.472,16.764 20.538,16.83 U5.11 22.305,16.83 v1(24.765,19.29)
PIO3: R1.2 U1.27 U5.12 | length 17.3
  Top Layer w0.254: U1.27 15.326,16.884 18.736,20.295 v1(23.216,20.295)
  Bottom Layer w0.254: R1.2 20.498,18.034 20.502,18.03 U5.12 22.297,18.03 23.216,18.948 v1(23.216,20.295)
SWCLK: P3.3 U1.37 | length 95
  Top Layer w0.254: U1.37 9.373,13.026 9.373,18.237 8.636,18.974 2.286,18.974 0.508,20.752 0.508,28.473 1.524,29.489 9.906,29.489 10.643,30.226 10.643,33.198 12.802,33.198 12.802,31.242 14.275,29.769 21.844,29.769 25.984,25.629 27.838,25.629 28.372,26.162 28.372,28.702 28.956,29.286 29.972,29.286 30.556,28.702 30.556,20.091 33.274,17.374 33.274,14.072 v1(34.9,12.446)
  Bottom Layer w0.254: P3.3 27.381,10.1 28.016,9.017 34.874,9.017 35.255,9.398 35.255,12.09 v1(34.9,12.446)
SWDIO: P3.5 U1.34 | length 33.9
  Top Layer w0.254: U1.34 11.826,16.19 11.786,19.66 12.395,20.269 17.78,20.269 18.771,21.26 25.248,21.26 27.534,18.974 v1(28.042,18.974) ; v1(29.972,17.628) 29.972,13.538 31.626,11.884 P3.5
  Bottom Layer w0.254: v1(28.042,18.974) 28.626,18.974 v1(29.972,17.628)
UART1_RX_STM: U1.22 U5.5 | length 13.4
  Top Layer w0.254: U1.22 18.974,12.026 18.974,11.557 20.828,11.557 21.565,12.294 21.565,13.132 25.819,13.132 v1(27.318,11.633)
  Bottom Layer w0.254: v1(27.318,11.633) U5.5
UART1_TX_STM: U1.21 U5.6 | length 11.4
  Top Layer w0.254: U1.21 20.035,11.526 22.146,13.637 25.016,13.637 v1(26.111,14.732)
  Bottom Layer w0.254: v1(26.111,14.732) 26.118,14.725 U5.6
pads on no net: P3.6 U1.2 U1.10 U1.11 U1.14 U1.15 U1.16 U1.17 U1.20 U1.28 U1.29 U1.30 U1.31 U1.32 U1.33 U1.38 U1.40 U1.41 U1.42 U1.43 U1.45 U1.46 U3.2 U3.8 U5.1A U5.2@30.918,13.13 U5.3@29.718,13.13 U5.4 U5.13 U5.14 U5.15 U5.17 U5.18 U5.19 U5.20 U5.21 U5.22 U5.24A

## Polygon pours and split planes (outlines as drawn)
GND on GroundPanel (split plane): 24.639,29.639 24.716,29.576 24.805,29.528 24.9,29.499 25,29.49 35.49,29.49 35.49,5.51 25,5.51 24.9,5.501 24.805,5.472 24.716,5.424 24.639,5.361 20,0.722 19.461,1.261 19.384,1.324 19.295,1.372 19.2,1.401 19.1,1.41 19,1.401 18.905,1.372 18.816,1.324 18.739,1.261 18.676,1.184 18.628,1.095 18.599,1 18.59,0.9 18.599,0.8 18.628,0.705 18.676,0.616 18.739,0.539 18.768,0.51 9.51,0.51 9.51,5 9.501,5.1 9.472,5.195 9.424,5.284 9.361,5.361 9.284,5.424 9.195,5.472 9.1,5.501 9,5.51 0.51,5.51 0.51,29.49 9,29.49 9.1,29.499 9.195,29.528 9.284,29.576 9.361,29.639 9.424,29.716 9.472,29.805 9.501,29.9 9.51,30 9.51,34.49 19.789,34.49

## Silkscreen, mask and mechanical layers (free items; w line width, h text height)
Mechanical 16:
  drawing of 1874 lines, arcs and shapes, not listed
  text "1" at -29.286,135.509 h1.78
  text "2" at 43.358,135.509 h1.78
  text "3" at 116.51,135.509 h1.78
  text "4" at 189.408,135.509 h1.78
  text "A" at -63.627,112.497 h1.78
  text "A" at 223.393,112.497 h1.78
  text "B" at -63.627,64.44 h1.78
  text "B" at 223.393,64.44 h1.78
  text "C" at -63.627,15.926 h1.78
  text "ENGINEER:" at 108.458,-21.082 h1.14
  text "TITLE:" at 146.558,-21.082 h1.14
  text "PCB DESIGNER:" at 108.458,-28.575 h1.14
  text "D" at -63.627,-32.08 h1.78
  text "D" at 223.393,-32.08 h1.78
  text "DATE:" at 108.458,-36.322 h1.14
  text "PART NO.:" at 146.558,-36.322 h1.14
  text "REV:" at 199.898,-36.322 h1.14
  text "C" at 8.293,-37.351 h1.78
  text "Altium Limited" at 75.438,-38.862 h1.78
  text ".PRINT_DATE" at 109.728,-39.37 h1.78
  text "12a Rodborough Rd" at 75.438,-41.402 h1.78
  text "Frenchs Forest" at 75.438,-43.942 h1.78
  text "FILE NAME:" at 108.458,-43.942 h1.14
  text "DWG NO:" at 146.558,-43.942 h1.14
  text "SCALE:" at 199.898,-43.942 h1.14
  text "NSW 2086" at 75.438,-46.482 h1.78
  text ".PCB_FILE_NAME_NO_PATH" at 109.728,-46.99 h1.78
  text "1" at -29.286,-52.451 h1.78
  text "2" at 43.358,-52.451 h1.78
  text "3" at 116.51,-52.451 h1.78
  text "4" at 189.408,-52.451 h1.78

## Text inside footprints (layer, text, board x,y; h text height)
U5: Mechanical 11 "1" at 32.218,14.48 h1 r270